# EAGLE board clockbrd (EAGLE 7.2.0)
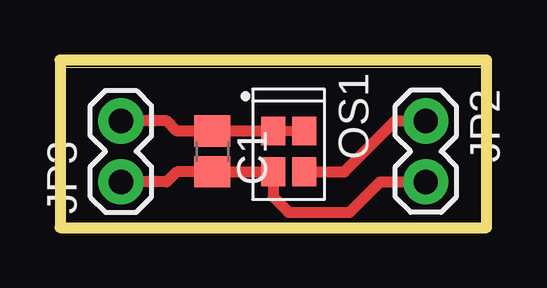
[diagram p0: board, top side]

Size 17.78 x 6.99 mm. Coordinates in mm from the lower left corner, seen from the top.
Outline: 0,0 17.76,0 17.76,6.66 0,6.66 0,0
Outline: 0,0 17.78,0 17.78,6.99 0,6.99 0,0
Copper layers (1*16): Top 0.035mm / dielectric 1.5mm / Bottom 0.035mm
Design rules "default": minimum track width 10mil, minimum drill 0.6mm, track to track 8mil, track to pad 8mil, pad to pad 8mil, via to via 8mil, smd to smd 8mil, copper to edge 40mil, drill to drill 8mil, minimum pad ring 10mil, minimum via ring 8mil, stop-mask expansion 4mil, vias tented up to drill 0mil, thermal gap 10mil

## Footprints (pad centres in the part's own frame; a part is rotated, then mirrored left to right if it is on the bottom)
C0805 = smd 1.3 x 1.5: 1 -0.85,0; 2 0.85,0
1X02 = drill 1.016 pad 1.88: 1 0,0; 2 2.54,0
2.5X2-4-PAD = smd 1.2 x 1: 1 -0.85,-0.65; 2 0.85,-0.65; 3 0.85,0.65; 4 -0.85,0.65

## Placement (x,y rotation side)
C1  [C0805]  6.35,3.17 270 top
DRILEGEND  [DRILEGEND]  -0.98,-13.57 0 top  (outside the outline)
JP2  [1X02]  15.24,4.45 270 top
JP3  [1X02]  2.54,1.91 90 top
OS1  OSC-OE-IQXO-793  [2.5X2-4-PAD]  9.53,3.17 270 top

## Library data of the parts
C1 = adafruit
DRILEGEND = drilegend
JP2 JP3 = SparkFun-Connectors
OS1 = IQD-Frequency-Products

## Nets
CLK: JP2.1 OS1.3
GND: C1.2 JP2.2 JP3.1 OS1.2
VCC: C1.1 JP3.2 OS1.1 OS1.4

## Tracks (layer width: path | path; a pad name or v marks a point on that pad's centre or on a via)
CLK
  Top 0.457: OS1.3 11.85,2.33 13.97,4.45 JP2.1
GND
  Top 0.457: JP3.1 4.45,1.91 4.87,2.33 C1.2 OS1.2 8.88,1.28 9.53,0.64 12.06,0.64 13.34,1.91 JP2.2
VCC
  Top 0.406: OS1.4 OS1.1
  Top 0.457: OS1.1 C1.1 4.87,4.03 4.45,4.45 JP3.2

## Text on the board
DrillLegend: LAYER-STACK
DrillLegend_01-16: 01-16